# EAGLE board Rapide328smd (EAGLE 6.3)
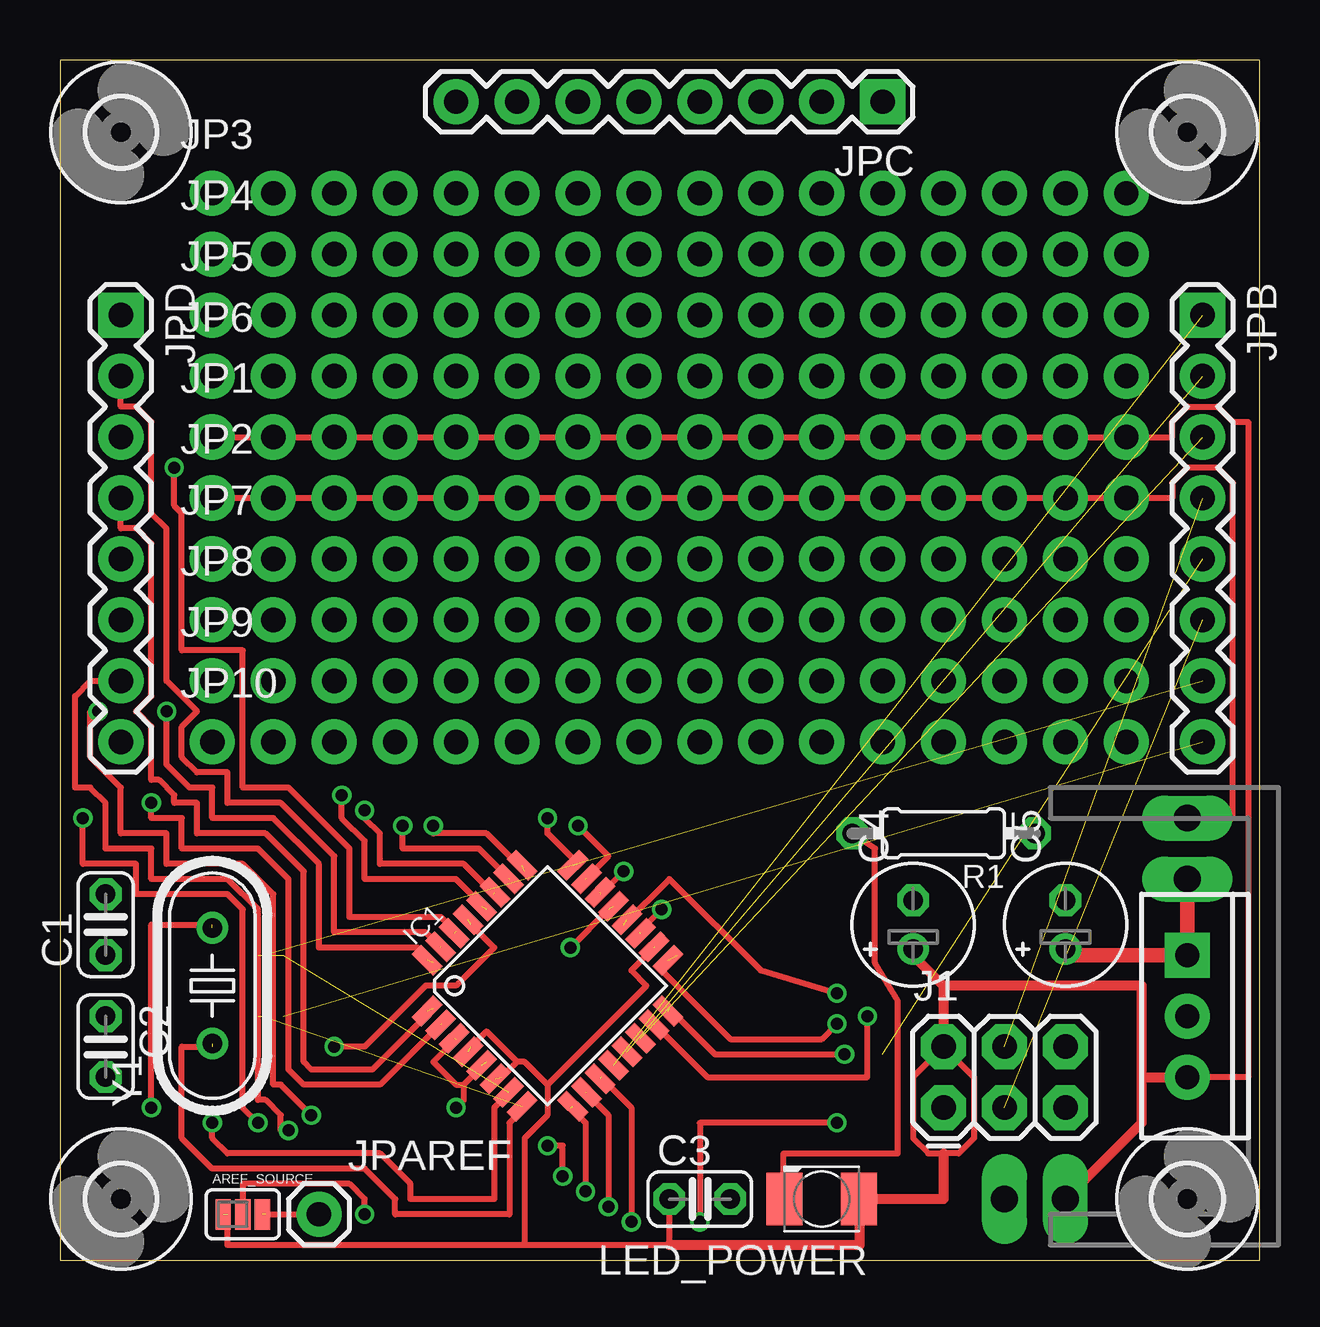
[diagram p0: board, top side]
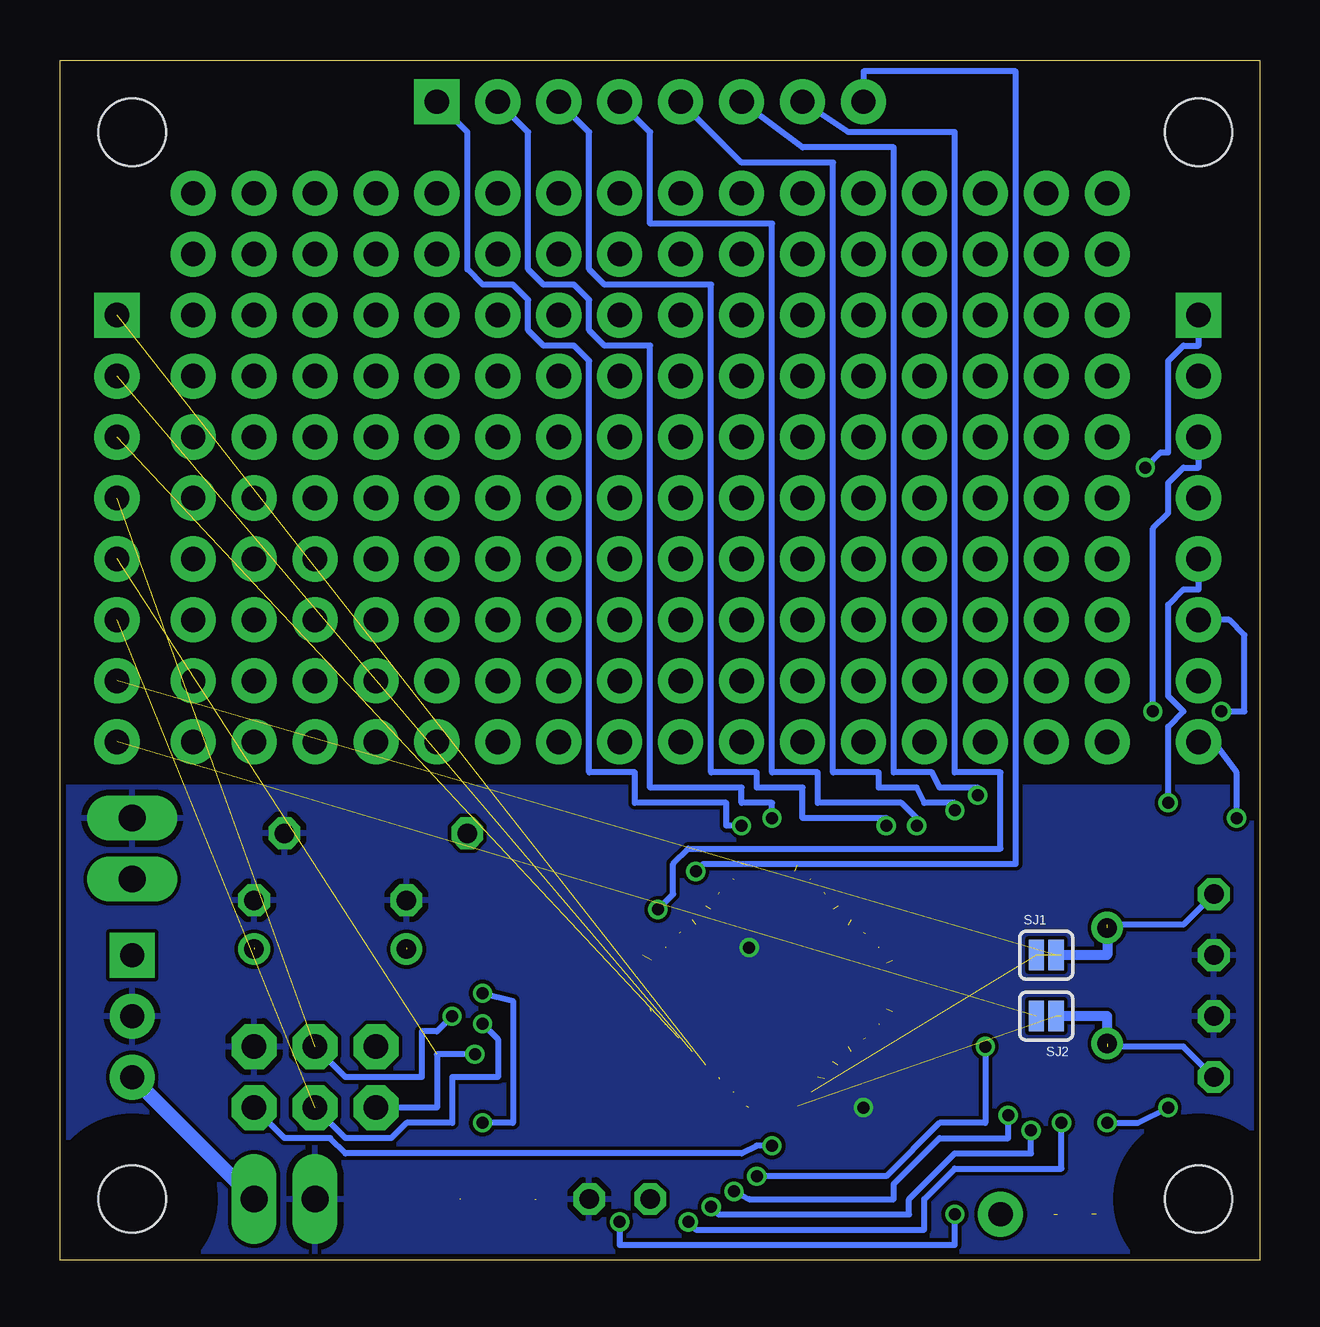
[diagram p1: board, bottom side, seen from below]

Size 50 x 50 mm. Coordinates in mm from the lower left corner, seen from the top.
Outline: 0,0 50,0 50,50 0,50 0,0
Copper layers (1*16): Top 0.035mm / dielectric 1.5mm / Bottom 0.035mm
Design rules "Fusion_eagle_rule_v1.1": minimum track width 6mil, minimum drill 12mil, track to track 6mil, track to pad 6mil, pad to pad 6mil, via to via 6mil, smd to smd 0mil, copper to edge 10mil, drill to drill 10mil, minimum pad ring 10mil, minimum via ring 6mil, stop-mask expansion 2mil, vias tented up to drill 100mil, thermal gap 10mil

## Footprints (pad centres in the part's own frame; a part is rotated, then mirrored left to right if it is on the bottom)
SJ_3_PASTE1&2 = smd 0.635 x 1.27: 1 -0.813,0; 2 0,0; 3 0.813,0
C025-024X044 = drill 0.813 octagon: 1 -1.27,0; 2 1.27,0
E2-5 = drill 0.813 pad 1.27: + -1.016,0 | drill 0.813 pad 1.27 octagon: - 1.016,0
2,8 = hole 2.8: 0,0
TQFP32-08 = smd 1.27 x 0.559: 1 -4.293,2.8; 2 -4.293,2; 3 -4.293,1.2; 4 -4.293,0.4; 5 -4.293,-0.4; 6 -4.293,-1.2; 7 -4.293,-2; 8 -4.293,-2.8; 17 4.293,-2.8; 18 4.293,-2; 19 4.293,-1.2; 20 4.293,-0.4; 21 4.293,0.4; 22 4.293,1.2; 23 4.293,2; 24 4.293,2.8 | smd 0.559 x 1.27: 9 -2.8,-4.293; 10 -2,-4.293; 11 -1.2,-4.293; 12 -0.4,-4.293; 13 0.4,-4.293; 14 1.2,-4.293; 15 2,-4.293; 16 2.8,-4.293; 25 2.8,4.293; 26 2,4.293; 27 1.2,4.293; 28 0.4,4.293; 29 -0.4,4.293; 30 -1.2,4.293; 31 -2,4.293; 32 -2.8,4.293
TO220-IGO = drill 1 pad 1.88: GND 0,0; OUT 2.54,0 | drill 1 pad 1.88 square: IN -2.54,0
2X3 = drill 1.016 pad 1.88 octagon: 1 0,0; 2 0,2.54; 3 2.54,0; 4 2.54,2.54; 5 5.08,0; 6 5.08,2.54
1X16_NO_SILK = drill 1.016 pad 1.88: 1 0,0; 2 2.54,0; 3 5.08,0; 4 7.62,0; 5 10.16,0; 6 12.7,0; 7 15.24,0; 8 17.78,0; 9 20.32,0; 10 22.86,0; 11 25.4,0; 12 27.94,0; 13 30.48,0; 14 33.02,0; 15 35.56,0; 16 38.1,0
1X02_LONGPADS = drill 1.118 pad 1.88 long: 1 0,0; 2 2.54,0
1X01 = drill 1.016 pad 1.88: 1 0,0
1X08 = drill 1.016 pad 1.88 square: 1 0,0 | drill 1.016 pad 1.88: 2 2.54,0; 3 5.08,0; 4 7.62,0; 5 10.16,0; 6 12.7,0; 7 15.24,0; 8 17.78,0
KA-3528ASYC = smd 1.5 x 2.2: A -1.55,0; C 1.55,0
0204/7 = drill 0.813 octagon: 1 -3.81,0; 2 3.81,0
SJ_2S = smd 0.635 x 1.27: 1 -0.412,0; 2 0.412,0
HC49U-V = drill 0.813: 1 -2.413,0; 2 2.413,0

## Placement (x,y rotation side)
AREF_SOURCE  [SJ_3_PASTE1&2]  7.62,1.91 0 top
C1  22pF  [C025-024X044]  1.91,13.97 90 top
C2  22pF  [C025-024X044]  1.91,8.89 270 top
C3  1uF  [C025-024X044]  26.67,2.54 0 top
C4  10uF  [E2-5]  35.56,13.97 90 top
C5  100uF  [E2-5]  41.91,13.97 90 top
H1  MOUNT-HOLE2.8  [2,8]  2.54,46.99 0 top
H2  MOUNT-HOLE2.8  [2,8]  46.99,46.99 0 top
H3  MOUNT-HOLE2.8  [2,8]  46.99,2.54 0 top
H4  MOUNT-HOLE2.8  [2,8]  2.54,2.54 0 top
IC1  MEGA8-AI  [TQFP32-08]  20.32,11.43 45 top
IC2  [TO220-IGO]  46.99,10.16 270 top
J1  AVR_SPI_PRG_6PTH  [2X3]  36.83,6.35 0 top
JP1  M161X16_NO_SILK  [1X16_NO_SILK]  6.35,34.29 0 top
JP2  M161X16_NO_SILK  [1X16_NO_SILK]  6.35,31.75 0 top
JP3  M161X16_NO_SILK  [1X16_NO_SILK]  6.35,44.45 0 top
JP4  M161X16_NO_SILK  [1X16_NO_SILK]  6.35,41.91 0 top
JP5  M161X16_NO_SILK  [1X16_NO_SILK]  6.35,39.37 0 top
JP6  M161X16_NO_SILK  [1X16_NO_SILK]  6.35,36.83 0 top
JP7  M161X16_NO_SILK  [1X16_NO_SILK]  6.35,29.21 0 top
JP8  M161X16_NO_SILK  [1X16_NO_SILK]  6.35,26.67 0 top
JP9  M161X16_NO_SILK  [1X16_NO_SILK]  6.35,24.13 0 top
JP10  M161X16_NO_SILK  [1X16_NO_SILK]  6.35,21.59 0 top
JP_POWER  [1X02_LONGPADS]  39.37,2.54 0 top
JP_RAW  [1X02_LONGPADS]  46.99,18.41 270 top
JPAREF  M01PTH  [1X01]  10.79,1.91 0 top
JPB  [1X08]  47.62,39.37 270 top
JPC  [1X08]  34.29,48.26 180 top
JPD  [1X08]  2.54,39.37 270 top
LED_POWER  [KA-3528ASYC]  31.75,2.54 180 top
R1  200+  [0204/7]  36.83,17.78 180 top
SJ1  SOLDERJUMPERNC  [SJ_2S]  8.89,12.7 0 bottom
SJ2  SOLDERJUMPERNC  [SJ_2S]  8.89,10.16 180 bottom
Y1  [HC49U-V]  6.35,11.43 90 top

## Library data of the parts
AREF_SOURCE SJ1 SJ2 = SparkFun-Passives
C1-C5 R1 = resistor
H1-H4 = holes
IC1 = atmel; MPN: ATMEGA8-16AU; OC_FARNELL: 9171371; OC_NEWARK: 73M8863
IC2 = SparkFun-PowerIC
J1 JP1-JP10 JP_POWER JP_RAW JPAREF JPB JPC JPD = SparkFun-Connectors
LED_POWER = led
Y1 = SparkFun-FreqCtrl

## Nets
GND: C1.1 C2.1 C3.2 C4.- C5.- IC1.3 IC1.5 IC1.21 IC2.GND J1.6 JP2.1 JP2.2 JP2.3 JP2.4 JP2.5 JP2.6 JP2.7 JP2.8 JP2.9 JP2.10 JP2.11 JP2.12 JP2.13 JP2.14 JP2.15 JP2.16 JP_POWER.1 JP_RAW.1 R1.1
MISO: IC1.16 J1.1 JPB.5
MOSI: IC1.15 J1.4 JPB.4
N$1: C1.2 IC1.7 SJ1.1 Y1.2
N$7: IC1.25 JPC.3
N$9: IC1.24 JPC.2
N$11: IC1.23 JPC.1
N$12: IC1.22 JPC.8
N$14: IC1.19 JPC.7
N$15: IC1.28 JPC.6
N$16: IC1.27 JPC.5
N$17: IC1.26 JPC.4
N$18: AREF_SOURCE.2 IC1.20
N$20: IC1.12 JPB.1
N$21: IC1.13 JPB.2
N$22: IC1.14 JPB.3
N$23: JPB.7 SJ1.2
N$24: JPB.8 SJ2.2
N$26: C2.2 IC1.8 SJ2.1 Y1.1
N$27: AREF_SOURCE.3 JPAREF.1
N$28: IC1.11 JPD.8
N$30: LED_POWER.C R1.2
N$32: IC1.10 JPD.7
N$36: IC1.9 JPD.6
N$39: IC1.2 JPD.5
N$40: IC1.1 JPD.4
N$41: IC1.32 JPD.3
N$43: IC1.31 JPD.2
N$44: IC1.30 JPD.1
RESET: IC1.29 J1.5
SCK: IC1.17 J1.3 JPB.6
VCC: AREF_SOURCE.1 C3.1 C4.+ IC1.4 IC1.6 IC1.18 IC2.OUT J1.2 JP1.1 JP1.2 JP1.3 JP1.4 JP1.5 JP1.6 JP1.7 JP1.8 JP1.9 JP1.10 JP1.11 JP1.12 JP1.13 JP1.14 JP1.15 JP1.16 JP_POWER.2 LED_POWER.A
VRAW: C5.+ IC2.IN JP_RAW.2

## Tracks (layer width: path | path; a pad name or v marks a point on that pad's centre or on a via)
GND  (via drill 0.5)  (3 unrouted)
  Top 0.254: JP_RAW.1 48.9,18.41 48.9,32.38 48.26,33.02 46.99,33.02 46.35,32.38 46.35,31.75 JP2.16 JP2.15 JP2.14 JP2.13 JP2.12 JP2.11 JP2.10 JP2.9 JP2.8 JP2.7 JP2.6 JP2.5 JP2.4 JP2.3 JP2.2 JP2.1 | 16.51,9.21 15.56,8.26 16.51,7.3 16.83,7.3 | 16.83,7.3 17.78,8.26 | 16.83,7.3 16.83,6.67 v16.51,6.35 | 22.86,14.61 v21.27,13.02
  pour Bottom: -1.91,19.68 50.8,19.68 50.8,-0.64 -1.91,-0.64
MISO  (via drill 0.5)  (2 unrouted)
  Top 0.254: 25.4,10.48 27.3,8.57 v32.7,8.57
  Bottom 0.254: v32.7,8.57 34.29,8.57 34.29,6.35 J1.1
MOSI  (via drill 0.5)  (2 unrouted)
  Top 0.254: 24.77,9.84 26.99,7.62 33.66,7.62 v33.66,10.16
  Bottom 0.254: v33.66,10.16 34.29,9.53 34.92,9.53 34.92,7.62 38.1,7.62 J1.4
N$1  (3 unrouted)
  Bottom 0.254: C1.2 3.17,13.97 6.03,13.97 6.35,13.65
  Bottom 0.406: 6.35,13.97 6.35,13.65 6.35,12.7 8.26,12.7
N$2
  Top 0.254: 19.37,6.35 18.73,5.71 18.73,1.91 13.97,1.91 13.97,2.54 12.7,3.81 6.35,3.81 5.08,5.08 5.08,8.89 6.35,8.89
N$7  (via drill 0.5)  (1 unrouted)
  Top 0.254: 19.37,16.19 17.78,17.78 15.56,17.78 v15.56,18.1
  Bottom 0.254: v15.56,18.1 15.56,18.41 19.05,18.41 19.05,19.68 20.95,19.68 20.95,20.32 22.86,20.32 22.86,40.64 27.3,40.64 27.94,41.27 27.94,46.99 JPC.3
N$9  (via drill 0.5)  (1 unrouted)
  Top 0.254: 21.27,16.19 21.59,16.51 20.32,17.78 v20.32,18.41
  Bottom 0.254: v20.32,18.41 20.32,19.05 21.59,19.05 21.59,19.68 25.4,19.68 25.4,38.1 27.3,38.1 27.94,38.73 27.94,40.01 28.57,40.64 29.84,40.64 30.48,41.27 30.48,46.99 JPC.2
N$11  (via drill 0.5)  (1 unrouted)
  Top 0.254: 21.91,15.88 22.86,16.83 v21.59,18.1
  Bottom 0.254: v21.59,18.1 22.23,18.1 22.23,19.05 26.04,19.05 26.04,20.32 27.94,20.32 27.94,37.47 28.57,38.1 29.84,38.1 30.48,38.73 30.48,40.01 31.11,40.64 32.38,40.64 33.02,41.27 33.02,46.99 JPC.1
N$12  (via drill 0.5)  (1 unrouted)
  Top 0.254: 22.54,15.24 v23.5,16.19
  Bottom 0.254: v23.5,16.19 23.18,16.51 10.16,16.51 10.16,49.53 16.51,49.53 JPC.8
N$14  (via drill 0.5)  (1 unrouted)
  Top 0.254: 24.13,13.65 v25.08,14.61
  Bottom 0.254: v25.08,14.61 24.45,15.24 24.45,16.51 23.81,17.14 10.79,17.14 10.79,20.32 12.7,20.32 12.7,46.99 17.14,46.99 JPC.7
N$15  (via drill 0.5)  (1 unrouted)
  Top 0.254: 17.78,14.61 16.51,15.88 12.7,15.88 12.7,17.46 11.75,18.41 v11.75,19.37
  Bottom 0.254: v11.75,19.37 11.75,19.68 13.34,19.68 13.65,20.32 15.24,20.32 15.24,46.35 19.05,46.35 JPC.6
N$16  (via drill 0.5)  (1 unrouted)
  Top 0.254: 18.1,15.24 16.83,16.51 13.34,16.51 13.34,17.78 12.7,18.41 v12.7,18.73
  Bottom 0.254: v12.7,18.73 12.7,19.05 13.97,19.05 14.29,19.68 15.88,19.68 15.88,20.32 17.78,20.32 17.78,45.72 21.59,45.72 JPC.5
N$17  (via drill 0.5)  (1 unrouted)
  Top 0.254: 18.73,15.88 17.46,17.14 14.29,17.14 v14.29,18.1
  Bottom 0.254: v14.29,18.1 14.29,18.41 14.92,19.05 18.41,19.05 18.41,20.32 20.32,20.32 20.32,43.18 25.4,43.18 25.4,46.99 JPC.4
N$18  (via drill 0.5)  (1 unrouted)
  Top 0.254: 23.5,13.97 25.4,15.88 29.21,12.06 v32.38,11.11 | v32.38,5.71 26.67,5.71 v26.67,1.59 | v12.7,1.91 12.7,2.54 12.06,3.17 7.62,3.17 AREF_SOURCE.2
  Bottom 0.254: v32.38,11.11 31.11,10.79 31.11,5.71 v32.38,5.71 | v26.67,1.59 26.67,0.64 12.7,0.64 v12.7,1.91
N$20  (1 unrouted)
N$21  (1 unrouted)
N$22  (1 unrouted)
N$23  (1 unrouted)
N$24  (1 unrouted)
N$25  (via drill 0.5)
  Top 0.254: 18.73,6.99 18.1,6.35 18.1,2.54 14.61,2.54 14.61,3.17 13.34,4.45 6.99,4.45 6.35,5.08 v6.35,5.71 | v3.81,6.35 3.81,13.97 6.35,13.97
  Bottom 0.254: v6.35,5.71 5.08,5.71 v3.81,6.35
N$26  (3 unrouted)
  Bottom 0.254: C2.2 3.17,8.89 6.35,8.89
  Bottom 0.406: 6.35,8.89 6.35,10.16 8.26,10.16
N$27  (1 unrouted)
  Top 0.254: 8.57,1.91 JPAREF.1
N$28  (via drill 0.5)  (1 unrouted)
  Top 0.254: 22.54,7.62 23.81,6.35 v23.81,1.59 | v8.26,5.71 7.62,6.35 7.62,14.61 6.99,15.24 3.17,15.24 3.17,16.51 0.95,16.51 v0.95,18.41
  Bottom 0.254: v23.81,1.59 23.5,1.27 13.97,1.27 13.97,2.54 12.7,3.81 8.26,3.81 v8.26,5.71 | v0.95,18.41 0.95,20.32 1.91,21.59 JPD.8
N$30  (1 unrouted)
  Top 0.254: 30.16,2.54 30.16,4.45 34.92,4.45 34.92,10.79 33.97,12.38 33.97,17.14 R1.2
N$32  (via drill 0.5)  (1 unrouted)
  Top 0.254: 21.91,6.99 22.86,6.03 v22.86,2.22 | v9.53,5.4 9.21,5.4 9.21,6.03 8.57,6.67 8.26,6.67 8.26,14.61 6.99,15.88 3.81,15.88 3.81,17.14 1.91,17.14 1.91,19.05 1.27,19.68 0.64,19.68 0.64,23.5 1.27,24.13 JPD.7
  Bottom 0.254: v22.86,2.22 22.54,1.91 14.61,1.91 14.61,2.54 12.7,4.45 9.53,4.45 v9.53,5.4
N$36  (via drill 0.5)  (1 unrouted)
  Top 0.254: 21.27,6.35 21.91,5.71 v21.91,2.86 | v10.48,6.03 9.21,7.3 8.89,7.3 8.89,15.24 7.62,16.51 4.45,16.51 4.45,17.78 2.54,17.78 2.54,19.68 1.27,20.95 1.27,22.86 v1.59,22.86
  Bottom 0.254: v21.91,2.86 21.27,2.54 15.24,2.54 15.24,3.17 13.34,5.08 10.48,5.08 v10.48,6.03 | v1.59,22.86 0.64,22.86 0.64,26.04 1.27,26.67 JPD.6
N$39  (via drill 0.5)  (1 unrouted)
  Top 0.254: 15.88,9.84 13.34,7.3 10.16,7.3 9.53,7.94 9.53,15.88 8.26,17.14 5.08,17.14 5.08,18.41 3.81,18.41 v3.81,19.05
  Bottom 0.254: v3.81,19.05 3.81,22.23 3.17,22.86 3.81,23.5 3.81,27.3 3.17,27.94 2.54,27.94 JPD.5
N$40  (1 unrouted)
  Top 0.254: 15.56,10.48 13.02,7.94 10.48,7.94 10.16,8.26 10.16,16.19 8.57,17.78 5.71,17.78 5.71,19.05 4.76,19.05 4.76,19.37 4.13,20 3.81,20 3.81,22.23 3.17,22.86 3.81,23.5 3.81,29.84 3.17,30.48 2.54,30.48 JPD.4
N$41  (via drill 0.5)  (1 unrouted)
  Top 0.254: 15.56,12.38 14.92,13.02 10.79,13.02 10.79,16.51 8.89,18.41 6.35,18.41 6.35,19.68 5.4,19.68 4.45,20.64 v4.45,22.86
  Bottom 0.254: v4.45,22.86 4.45,30.48 3.81,31.11 3.81,32.38 3.17,33.02 2.54,33.02 JPD.3
N$43  (1 unrouted)
  Top 0.254: 15.88,13.02 15.24,13.65 11.43,13.65 11.43,16.83 9.21,19.05 6.99,19.05 6.99,20.32 5.71,20.32 5.08,20.95 5.08,22.23 5.71,22.86 4.45,24.13 4.45,30.48 3.81,31.11 3.81,34.92 3.17,35.56 2.54,35.56 JPD.2
N$44  (via drill 0.5)  (1 unrouted)
  Top 0.254: 16.51,13.65 15.88,14.29 12.06,14.29 12.06,17.14 9.53,19.68 7.62,19.68 7.62,25.4 5.08,25.4 5.08,31.11 4.76,31.43 v4.76,33.02
  Bottom 0.254: v4.76,33.02 4.13,33.66 3.81,33.66 3.81,37.47 3.17,38.1 2.54,38.1 JPD.1
RESET  (via drill 0.5)  (1 unrouted)
  Top 0.254: v20.95,3.49 20.95,4.76 v20.32,4.76 | 17.14,13.97 18.1,13.02 16.51,11.43 15.24,11.43 12.7,8.89 v11.43,8.89
  Bottom 0.254: v11.43,8.89 11.43,5.71 13.34,5.71 15.56,3.49 v20.95,3.49 | v20.32,4.76 20.95,4.76 21.59,4.45 38.1,4.45 38.73,5.08 40.64,5.08 J1.5
SCK  (via drill 0.5)  (2 unrouted)
  Top 0.254: 25.72,12.7 25.08,12.06 27.94,9.21 31.75,9.21 v32.38,9.84
  Bottom 0.254: v32.38,9.84 31.75,9.21 31.75,7.62 33.66,7.62 33.66,5.71 35.56,5.71 36.2,5.08 38.1,5.08 J1.3
VCC  (6 unrouted)
  Top 0.254: JP1.1 JP1.2 JP1.3 JP1.4 JP1.5 JP1.6 JP1.7 JP1.8 JP1.9 JP1.10 JP1.11 JP1.12 JP1.13 JP1.14 JP1.15 JP1.16 46.35,34.29 46.35,34.92 46.99,35.56 48.26,35.56 48.9,34.92 49.53,34.92 49.53,7.62 IC2.OUT | 24.77,13.02 23.81,12.06 24.45,11.43 20.32,7.3 | 17.14,8.89 17.78,9.53 19.05,8.26 | 19.05,8.26 18.41,7.62 | 19.05,8.26 19.37,8.26 20.32,7.3 | 20.32,7.3 20.32,6.03 19.37,5.08 19.37,0.64 | C3.1 25.4,0.64 20.95,0.64 20.32,0.64 19.37,0.64 | 19.37,0.64 6.99,0.64 6.99,1.91 | 33.34,2.54 33.34,2.22 33.02,2.54 | J1.2 38.1,7.62 38.1,5.08 37.47,4.45 36.83,4.45 36.2,4.45 35.56,5.08 35.56,7.62 J1.2
  Top 0.406: JP_POWER.2 45.09,5.71 45.09,7.62 | 45.09,7.62 45.09,11.43 36.83,11.43 | 36.83,11.43 J1.2 | 36.83,11.43 35.56,12.7 35.56,13.02 | 45.09,7.62 IC2.OUT | 36.83,4.45 36.83,2.54 33.02,2.54 | 25.4,0.64 33.34,0.64 33.34,2.22
  Bottom 0.61: JP_POWER.2 IC2.OUT
VRAW  (1 unrouted)
  Top 0.61: JP_RAW.2 IC2.IN 42.23,12.7 41.91,13.02